# Altium PCB GPS SIM868-V10-ST-F0.PcbDoc (part 2 of 2)
Units mm, origin at the board's own origin, x right, y up, seen from the top; angles counter-clockwise.
Board outline 43.41 x 89 mm, 2 copper layers (Top Layer, Bottom Layer); 89 components, 73 nets, 330 pads, 120 vias.
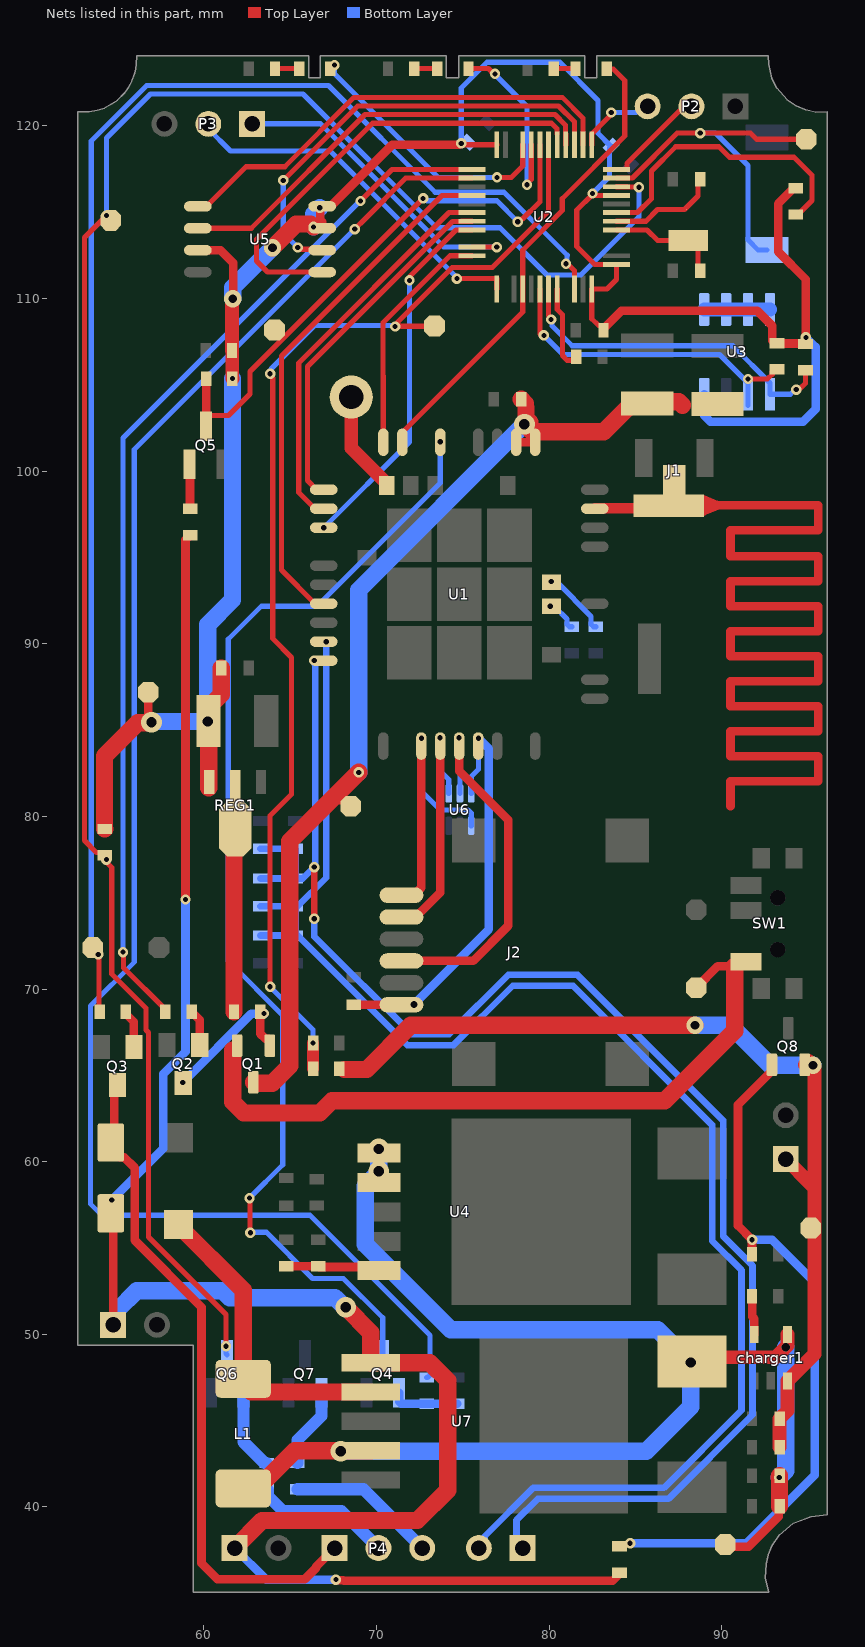
[diagram p2: the nets of this part, all layers, seen from the top]

## Via types
v1: diameter 0.6, hole 0.3, Top Layer to Bottom Layer, tented both sides, 95 vias
v2: diameter 1.2, hole 0.6, Top Layer to Bottom Layer, tented both sides, 12 vias
v3: diameter 1, hole 0.5, Top Layer to Bottom Layer, tented both sides, 10 vias
v4: diameter 0.5, hole 0.5, Top Layer to Bottom Layer, tented both sides, 1 vias
v5: diameter 0.8, hole 0.4, Top Layer to Bottom Layer, tented both sides, 1 vias
v6: diameter 1, hole 0.6, Top Layer to Bottom Layer, tented both sides, 1 vias

## Nets (pads, with @x,y where several pads share a name; then routed paths per layer and width w, separated by ;. In a path a pad name is that pad's centre, name@x,y a point inside that pad or via, vN(x,y) a via of type N, cw(c..) or ccw(c..) an arc to the next point about the centre after c; other vN are vias at no path point) (continued)
IOMC: pad.13@54.603,114.525 Q6.3 R16.2 U2.10 | length 115.4
  Top Layer w0.3: v1@54.275,77.424 v1(54.346,77.495) ; v1(54.346,114.808) 53.074,113.537 53.074,78.599 53.774,77.899 54.104,77.899 R16.2@54.254,77.749 54.254,77.546 54.204,77.495 54.661,77.038 54.661,70.866 56.642,68.885 56.642,67.626 56.791,67.477 56.791,55.629 61.272,51.148 v1(61.272,49.301) ; U2.10@83.89,116.476 84.51,116.476 84.52,116.466 85.177,116.466 v1(85.195,116.448)
  Bottom Layer w0.3: v1(54.346,114.808) 54.346,119.293 56.896,121.844 65.731,121.844 73.478,114.097 77.14,114.097 79.874,111.363 81.822,111.363 85.19,114.73 85.19,116.443 v1(85.195,116.448) ; v1(61.272,49.301) 61.272,48.877 Q6.3@61.341,48.809
MEM_CLK: U2.15 U5.6 | length 26.1
  Top Layer w0.3: v1(64.59,116.842) 68.901,121.154 80.541,121.154 81.46,120.235 U2.15@81.46,118.906 ; v1(65.428,112.957) 65.509,112.957 65.607,112.859 66.804,112.859 U5.6@66.828,112.834
  Bottom Layer w0.3: v1(64.59,116.842) 64.59,113.794 v1(65.428,112.957)
MEM_CS: U2.14 U5.1 | length 27
  Top Layer w0.3: U5.1@59.646,115.341 60.146,115.341 62.44,117.635 64.676,117.635 68.694,121.654 80.749,121.654 81.96,120.442 U2.14@81.96,118.906
MEM_SI: U2.17 U5.5 | length 26
  Top Layer w0.3: U5.5@66.846,111.531 63.682,111.531 63.043,112.17 63.043,113.436 69.76,120.154 80.127,120.154 80.45,119.831 U2.17@80.45,119.536
MEM_SO: U2.16 U5.2 | length 25.4
  Top Layer w0.3: U5.2@59.646,114.071 62.738,114.071 69.321,120.654 80.334,120.654 80.95,120.038 80.95,119.536 80.96,119.526 U2.16@80.96,118.906
MIC_N: C9.2 C10.2 C11.1 C12.1 P1.1 U1.10 | length 89.9
  Top Layer w0.381: v1(66.386,77.064) 66.386,74.204 66.455,74.135 v1@66.455,74.075
  Bottom Layer w0.381: C9.2@63.271,76.403 C10.2@65.303,76.403 ; C12.1@63.271,78.13 C11.1@65.303,78.13 C10.2@65.303,76.403 ; v1(66.382,89.027) 66.424,88.985 66.424,88.83 66.442,88.813 66.442,77.274 66.428,77.26 66.428,77.106 v1(66.386,77.064) 65.726,76.403 C10.2@65.303,76.403 ; v1(66.386,74.075) 66.386,73.041 72.041,67.386 74.193,67.386 77.627,70.82 81.64,70.82 90.068,62.391 90.068,55.686 91.774,53.98 91.774,45.334 86.902,40.462 79.329,40.462 78.105,39.238 78.105,37.973 P1.1@78.461,37.617
MIC_P: C7.2 C8.2 C9.1 C10.1 P1.2 U1.9 | length 89.4
  Top Layer w0.381: U1.9@66.937,90.124 67.026,90.124 U1.9@67.081,90.068
  Bottom Layer w0.381: C7.2@63.271,73.101 C8.2@65.303,73.101 ; C9.1@63.271,74.803 C10.1@65.303,74.803 ; v1@67.081,90.068 67.077,90.064 67.077,76.451 65.428,74.803 C10.1@65.303,74.803 ; P1.2@75.921,37.617 75.921,37.844 76.269,38.192 76.269,38.3 79.066,41.097 86.639,41.097 91.139,45.597 91.139,53.717 89.433,55.423 89.433,62.128 81.377,70.185 77.89,70.185 74.456,66.751 71.778,66.751 65.428,73.101 65.413,73.101 65.303,73.211 C10.1@65.303,74.803
  other v1: 67.081,90.119
"motion sensor": pad.13@94.894,119.228 SENSOR1.1 U2.11 | length 21.4
  Top Layer w0.3: U2.11@83.89,116.976 84.803,116.976 84.813,116.986 84.815,116.986 87.413,119.583 91.645,119.583 92,119.228 pad.13@94.894,119.228
  Bottom Layer w0.3: v1(88.748,119.583) 89.637,119.583 91.508,117.711 91.508,113.401 92.108,112.801 SENSOR1.1@92.608,112.801
NetA1_1: A1.1 J1.3 U1.32 | length 5.8
  Top Layer w0.3: A1.1@86.919,97.993 87.249,98.323 J1.3@87.249,99.352
  Top Layer w0.5: U1.32@82.637,97.824 U1.32@82.656,97.843
  Top Layer w0.6: U1.32@82.656,97.843 A1.1@86.919,97.843
NetAnt1_1: Ant1.1 U1.68 | length 6
  Top Layer w0.8: Ant1.1@68.529,104.292 68.529,101.331 70.587,99.274 U1.68@70.587,99.174
Netcharger1_5: charger1.5 R23.1 | length 2.3
  Top Layer w0.5: R23.1@91.745,52.197 91.745,52.027 91.75,52.022 91.75,51.022 91.872,50.9 charger1.5@91.872,49.987
NetD1_A: D1.A P4.1 Q3.3 | length 39.1
  Top Layer w0.5: Q3.3@54.991,64.432 54.798,64.239 54.798,61.302 D1.A@54.606,61.109 54.606,60.769 55.121,60.254 55.371,60.254 55.982,59.643 55.982,55.448 59.858,51.572 59.858,36.742 60.786,35.814 65.837,35.814 66.499,36.476 66.499,36.552 P4.1@67.564,37.617
NetD2_2: D2.2 L1.1 U7.2 | length 18.6
  Top Layer w1: D2.2@58.318,56.363 58.468,56.363 62.272,52.559 62.272,47.117 62.731,46.658 U7.2@69.664,46.658
NetLED1_2: LED1.2 R1.1 | length 1.3
  Top Layer w0.3: R1.1@80.264,123.317 LED1.2@81.521,123.317
NetLED2_1: LED2.1 U2.20 | length 11.3
  Top Layer w0.3: LED2.1@75.324,123.317 76.474,123.317 76.779,123.012 v1(76.86,123.012) ; v1(78.715,116.586) 78.715,116.667 78.96,116.913 U2.20@78.96,118.906
  Bottom Layer w0.3: v1(76.86,123.012) 76.86,122.982 78.715,121.127 v1(78.715,116.586)
NetLED2_2: LED2.2 R6.2 | length 1.3
  Top Layer w0.3: R6.2@72.187,123.317 LED2.2@73.52,123.317
NetLED3_1: LED3.1 U2.21 | length 15.4
  Top Layer w0.3: v1(76.972,117.018) 77.8,117.018 78.46,117.678 U2.21@78.46,118.906
  Bottom Layer w0.3: v1(67.564,123.52) 67.564,123.026 73.572,117.018 v1(76.972,117.018)
NetLED3_2: LED3.2 R7.2 | length 1.4
  Top Layer w0.3: R7.2@64.11,123.317 LED3.2@65.519,123.317
NETLIGHT: LED1.1 U1.41 U2.40 | length 27.6
  Top Layer w0.3: U1.41@71.487,101.674 71.487,102.246 78.46,109.22 78.46,111.176 78.461,112.801 80.753,115.094 80.753,115.784 84.379,119.409 84.379,122.631 83.706,123.304 83.337,123.304 LED1.1@83.325,123.317
NetP4_2: P4.2 R20.2 | length 8.1
  Bottom Layer w0.7: R20.2@63.627,41.021 63.677,40.971 63.702,40.971 63.702,40.641 64.592,39.751 67.97,39.751 P4.2@70.104,37.617
NetP4_3: P4.3 R21.2 | length 8.6
  Bottom Layer w0.7: R21.2@65.405,41.021 69.24,41.021 P4.3@72.644,37.617
NetQ1_1: Q1.1 Q2.3 R2.1 | length 9
  Top Layer w0.5: v1(58.768,64.592) Q2.3@58.801,64.559 ; v1(63.475,68.58) 63.373,68.682 R2.1@63.263,68.682 63.263,67.412 63.556,67.119 63.76,67.119 63.815,67.064 Q1.1@63.815,66.719
  Bottom Layer w0.5: v1(58.768,64.592) 62.736,68.561 63.455,68.561 v1(63.475,68.58)
NetQ2_1: Q2.1 R5.1 | length 2.2
  Top Layer w0.5: R5.1@59.286,68.682 59.286,68.557 59.336,68.507 59.453,68.507 59.751,68.209 Q2.1@59.751,66.759
NetQ3_1: Q3.1 R11.1 | length 2.2
  Top Layer w0.5: R11.1@55.476,68.682 55.476,68.557 55.941,68.092 Q3.1@55.941,66.632
NetQ4_1: Q4.1 R12.1 R14.1 | length 3.9
  Bottom Layer w0.5: Q4.1@71.308,46.609 71.308,46.109 71.443,45.974 R12.1@72.898,45.974 R14.1@74.676,45.974
NetQ5_1: Q5.1 R19.1 | length 2.6
  Top Layer w0.5: Q5.1@59.172,100.398 59.19,100.381 59.19,97.833 R19.1@59.207,97.815
NetQ6_1: Q6.1 R20.1 | length 4.7
  Bottom Layer w0.7: Q6.1@62.291,46.609 62.291,43.756 63.502,42.545 R20.1@63.627,42.545
NetQ7_1: Q7.1 R21.1 | length 4.6
  Bottom Layer w0.7: R21.1@65.405,42.545 65.405,43.866 66.797,45.258 Q7.1@66.797,46.609
NetQ8_1: Q8.1 R24.2 R26.1 | length 40.3
  Top Layer w0.5: R26.1@91.745,54.635 91.747,54.638 91.747,55.476 v1(91.75,55.479) 90.932,56.297 90.932,63.299 92.903,65.27 Q8.1@92.903,65.615
  Bottom Layer w0.5: v1(84.684,37.897) 91.44,37.897 95.372,41.829 95.372,53.015 92.908,55.479 v1(91.75,55.479)
NetR3_1: R3.1 U2.44 | length 5
  Top Layer w0.3: U2.44@80.46,110.546 80.46,109.357 80.76,109.057 80.76,106.702 81.036,106.426 81.409,106.426 81.559,106.576 R3.1@81.559,106.629
NetR4_2: R4.2 U2.7 | length 16.7
  Top Layer w0.3: U2.7@84.52,114.976 85.12,114.976 85.928,115.784 85.928,117.392 87.332,118.796 89.84,118.796 90.449,118.186 94.183,118.186 95.225,117.145 95.225,115.681 94.409,114.865 R4.2@94.284,114.865
NetR10_1: R10.1 R18.2 U4.5 | length 5.5
  Top Layer w0.5: R18.2@64.77,53.95 R10.1@66.624,53.95 66.674,53.9 69.921,53.9 U4.5@70.134,53.686
NetR27_2: R27.2 U1.62 | length 4
  Top Layer w0.3: v1(80.112,93.599) U1.62@80.137,93.574
  Bottom Layer w0.3: v1(80.112,93.599) 80.169,93.542 80.474,93.542 82.427,91.588 82.427,91.133 82.577,90.983 R27.2@82.702,90.983
NetR28_2: R28.2 U1.61 | length 2
  Top Layer w0.3: v1(80.061,92.177) 80.134,92.177 U1.61@80.137,92.174
  Bottom Layer w0.3: v1(80.061,92.177) 80.118,92.119 80.347,92.119 81.03,91.436 81.03,91.133 81.18,90.983 R28.2@81.305,90.983
NetU3_1: U3.1 U3.2 U3.3 U3.4 | length 3.8
  Bottom Layer w0.8: U3.1@88.976,109.364 U3.2@90.246,109.364 U3.3@91.516,109.364 U3.4@92.786,109.364
ONOFF_SIM: Q4.3 U1.39 | length 66.8
  Top Layer w0.3: v1(62.636,57.887) 62.662,57.861 62.662,55.905 v1(62.687,55.88)
  Top Layer w0.5: v1(73.685,101.702) 73.685,101.675 U1.39@73.687,101.674
  Bottom Layer w0.3: v1(62.636,57.887) 64.567,59.817 64.567,68.474 61.404,71.637 61.404,90.258 63.322,92.177 66.548,92.177 73.685,99.314 v1(73.685,101.702) ; v1(62.687,55.88) 62.713,55.905 63.627,55.905 66.294,53.238 68.072,53.238 70.358,50.952 Q4.3@70.358,48.809
ONOFF_STM: R12.2 U2.26 | length 96.2
  Top Layer w0.3: v1(68.732,114.021) 69.318,114.606 71.688,116.976 U2.26@75.53,116.976
  Bottom Layer w0.3: v1(68.732,114.021) 55.961,101.249 55.961,71.556 53.416,69.012 53.416,57.556 54.077,56.896 66.142,56.896 73.101,49.936 73.101,47.648 72.951,47.498 R12.2@72.898,47.498
OSC_IN: C24.1 U2.5 X1.2 | length 6.5
  Top Layer w0.3: U2.5@83.89,113.976 85.668,113.976 86.283,113.361 87.927,113.361 88.176,113.361 88.626,112.911 C24.1@88.626,111.608
OSC_OUT: C25.1 U2.6 X1.1 | length 6.3
  Top Layer w0.3: U2.6@83.89,114.476 85.596,114.476 86.279,115.158 87.838,115.158 88.626,115.946 C25.1@88.626,116.916
PWCUT: R5.2 U2.25 | length 60.9
  Top Layer w0.3: v1(55.311,72.136) 55.333,72.114 55.333,71.236 57.762,68.807 R5.2@57.762,68.682 ; v1(69.063,115.646) 70.892,117.476 U2.25@75.53,117.476
  Bottom Layer w0.3: v1(55.311,72.136) 55.311,101.912 69.045,115.646 v1(69.063,115.646)
RelayMC: pad.13@53.557,72.402 R11.2 U2.46 | length 86.4
  Top Layer w0.3: pad.13@53.557,72.402 53.873,72.086 v1(53.873,72.009) ; R11.2@53.952,68.682 53.913,68.721 53.913,71.967 pad.13@53.952,72.007 ; v1(80.974,112.013) 81.055,112.013 81.46,111.607 U2.46@81.46,110.546
  Bottom Layer w0.3: v1(53.873,72.009) 53.467,72.415 53.467,119.122 56.689,122.344 67.216,122.344 73.399,116.161 77.387,116.161 81.045,112.503 81.031,112.49 81.031,112.07 v1(80.974,112.013)
RESET: U1.3 U2.32 | length 21.3
  Top Layer w0.3: v1(71.904,111.052) 71.961,111.11 71.961,111.322 74.605,113.966 75.52,113.966 U2.32@75.53,113.976
  Bottom Layer w0.3: v1(66.937,96.724) 71.904,101.691 v1(71.904,111.052)
RING: U1.7 U2.28 | length 30.6
  Top Layer w0.3: U1.7@66.937,92.324 66.437,92.324 64.489,94.271 64.489,106.678 73.787,115.976 U2.28@75.53,115.976
RX: P2.3 U2.13 | length 4.6
  Top Layer w0.3: U2.13@82.46,118.906 82.46,119.526 83.539,120.604 83.539,120.72 v1(83.596,120.777)
  Bottom Layer w0.3: v1(83.596,120.777) 85.019,120.777 85.375,121.133 P2.3@85.7,121.133
SCL: R9.2 U2.42 U3.6 | length 19.3
  Top Layer w0.3: U2.42@79.46,110.546 79.46,107.953 79.491,107.922 79.632,107.922 v1(79.69,107.864) ; v1(91.516,105.334) 92.634,105.334 92.918,105.618 92.918,105.743 93.068,105.893 R9.2@93.193,105.893
  Bottom Layer w0.3: v1(79.69,107.864) 80.79,106.764 89.856,106.764 91.401,105.219 U3.6@91.516,105.104 ; U3.6@91.516,103.804 U3.6@91.516,105.104 ; v1(91.516,105.334) U3.6@91.516,105.104
SDA: R8.2 U2.43 U3.5 | length 19.9
  Top Layer w0.3: U2.43@79.96,110.546 79.96,109.019 80.11,108.869 v1(80.11,108.788) ; v1(94.31,104.724) 94.368,104.782 94.533,104.782 94.844,105.092 R8.2@94.844,105.842
  Bottom Layer w0.3: v1(80.11,108.788) 80.168,108.731 80.168,108.427 81.331,107.264 90.626,107.264 92.786,105.104 U3.5@92.786,104.454 93.958,104.454 94.229,104.724 v1(94.31,104.724)
"SIM_ I/O": J2.6 U1.15 U6.1 | length 17.2
  Top Layer w0.3: U1.15@72.587,84.074 72.587,84.525 v1(72.593,84.531)
  Top Layer w0.5: J2.6@71.438,75.438 72.158,75.438 72.587,75.867 U1.15@72.587,84.074
  Bottom Layer w0.3: v1(72.593,84.531) 72.593,81.458 73.685,80.366 75.303,80.366 75.478,80.19 U6.1@75.478,79.456
SIM_CLK: J2.3 U1.16 U6.4 | length 15.3
  Top Layer w0.3: v1(73.674,84.56) 73.687,84.547 U1.16@73.687,84.074
  Top Layer w0.5: J2.3@71.438,74.168 72.263,74.168 73.687,75.592 U1.16@73.687,84.074
  Bottom Layer w0.3: v1(73.674,84.56) 73.674,82.638 74.178,82.133 U6.4@74.178,81.326
SIM_RST: J2.2 U1.17 U6.5 | length 22.4
  Top Layer w0.3: v1(74.778,84.557) 74.787,84.547 U1.17@74.787,84.074
  Top Layer w0.5: J2.2@71.438,71.628 75.59,71.628 77.622,73.66 77.622,79.795 74.787,82.631 U1.17@74.787,84.074
  Bottom Layer w0.3: v1(74.778,84.557) 74.828,84.506 U6.5@74.828,81.326
SIM_VDD: C15.2 J2.1 U1.18 U6.6 | length 24.8
  Top Layer w0.3: U1.18@75.887,84.074 75.887,84.523 v1(75.895,84.531)
  Top Layer w0.5: C15.2@68.682,69.088 J2.1@71.438,69.088 72.136,69.088 v5(72.161,69.113)
  Bottom Layer w0.3: U6.6@75.478,81.326 75.478,82.311 75.895,82.728 v1@75.895,84.504
  Bottom Layer w0.5: v5(72.161,69.113) 76.505,73.457 76.505,83.922 v1(75.895,84.531)
SRXD: U1.2 U2.30 | length 23
  Top Layer w0.3: U1.2@66.937,97.824 66.437,97.824 65.489,98.771 65.489,106.264 74.201,114.976 U2.30@75.53,114.976
STATUS: U1.42 U2.35 | length 13.7
  Top Layer w0.3: U1.42@70.387,101.674 70.387,105.5 70.368,105.519 70.368,108.597 74.247,112.476 U2.35@75.53,112.476
STXD: U1.1 U2.31 | length 20.8
  Top Layer w0.3: U1.1@66.937,98.924 66.518,98.924 65.989,99.452 65.989,106.057 74.398,114.466 74.9,114.466 74.91,114.476 U2.31@75.53,114.476
SWCK: P3.2 U2.37 | length 21.2
  Top Layer w0.3: v1(74.651,111.15) 76.95,111.15 76.96,111.14 U2.37@76.96,110.546
  Bottom Layer w0.3: P3.2@60.249,120.117 60.249,119.837 61.544,118.542 67.31,118.542 74.651,111.201 v1(74.651,111.15)
SWIO: P3.1 U2.34 | length 18.6
  Top Layer w0.3: U2.34@75.53,112.976 75.532,112.978 76.96,112.978 v1(76.962,112.979)
  Bottom Layer w0.3: P3.1@62.789,120.117 P3.1@62.903,120.117 ; P3.1@62.903,120.231 63.009,120.125 66.743,120.125 73.889,112.979 v1(76.962,112.979)
TP1: C17.1 C18.1 C23.1 charger1.4 L1.2 pad.13@90.195,37.821 U4.1 U4.2 U7.4 | length 80.5
  Top Layer w0.5: pad.13@90.195,37.821 90.545,37.624 90.545,37.635 90.625,37.691 91.539,37.691 93.294,39.446 93.294,39.98 C18.1@93.344,40.03
  Top Layer w0.8: v2(88.197,48.362) 88.502,48.666 93.116,48.666 93.802,49.352 charger1.4@93.802,49.987
  Top Layer w1: L1.2@62.272,40.767 62.773,40.767 65.264,43.258 67.892,43.258 v2(67.92,43.231) 67.947,43.258 U7.4@69.664,43.258 ; v1(93.32,41.707) 93.344,41.732 C23.1@93.344,41.808 ; C18.1@93.344,40.03 C23.1@93.344,41.707
  Bottom Layer w1: v2(67.92,43.231) 85.623,43.231 88.197,45.805 v2(88.197,48.362) 86.292,50.267 74.295,50.267 69.342,55.22 69.342,58.594 70.129,59.382 v2(70.129,59.436) v2(70.129,60.731) ; v1(93.32,41.707) 93.701,42.088 v4(93.701,49.251)
TP2: C21.1 C22.1 charger1.3 P5.1 pad.13@95.145,56.152 Q8.2 R22.2 | length 55.2
  Top Layer w0.8: C22.1@93.344,43.459 C21.1@93.344,45.11 93.802,45.568 charger1.3@93.802,47.295 95.372,48.864 95.372,55.918 95.238,56.052 95.238,56.145 pad.13@95.245,56.152 ; P5.1@93.701,60.147 95.169,58.679 95.372,58.679 ; Q8.2@94.803,65.615 95.023,65.835 v3(95.275,65.583) 95.372,65.486 95.372,58.679 ; pad.13@95.372,56.152 95.372,58.679
  Top Layer w1: R22.2@68.135,65.341 69.431,65.341 71.984,67.894 v3(88.443,67.894)
  Bottom Layer w1: v3(88.443,67.894) 90.483,67.894 92.795,65.583 v3(95.275,65.583)
TP4: C4.1 C5.1 C6.1 C19.1 C20.2 pad.13@56.769,87.198 R4.1 R8.1 R9.1 R15.1 R16.1 R17.1 REG1.3 U2.1 U2.9 U2.24 U2.48 U3.8 U5.3 U5.7 U5.8 | length 137.5
  Top Layer w0.3: v3(61.671,109.982) v3@61.697,110.007 ; v1@74.922,118.906 U2.24@76.96,118.906 ; v1@82.448,115.976 U2.9@83.89,115.976 ; v1(82.503,116.082) 82.503,116.031 81.595,115.123 81.595,113.018 82.637,111.976 U2.1@83.89,111.976 83.89,111.094 83.342,110.546 U2.48@82.46,110.546 82.46,108.833 82.865,108.428 82.99,108.428 83.14,108.278 C5.1@83.14,108.153 ; R9.1@92.918,107.567 93.068,107.417 R9.1@93.193,107.417 R9.1@93.218,107.391
  Top Layer w0.5: pad.13@56.769,87.198 56.769,85.841 56.962,85.648 v2(56.962,85.458) ; U5.3@59.646,112.801 60.96,112.801 61.697,112.065 v3@61.697,110.007 ; U5.7@66.421,114.071 U5.7@66.846,114.071 66.846,114.432 66.737,114.54 U5.8@66.737,115.233 ; U5.8@66.846,115.341 67.346,115.341 70.91,118.906 74.795,118.906 74.878,118.989 v1(74.905,118.989) ; C5.1@83.19,108.316 83.19,108.328 83.211,108.328 84.179,109.296 92.05,109.296 92.918,108.428 R9.1@92.918,107.567 ; R9.1@93.218,107.391 R8.1@94.818,107.391 ; R4.1@94.284,116.389 94.261,116.411 94.181,116.411 93.269,115.499 93.269,112.702 94.869,111.102 v1(94.869,107.747)
  Top Layer w0.8: v1(61.646,105.359) 61.633,105.372 61.633,106.972 R17.1@61.62,106.985 61.62,109.904 61.671,109.955 v3(61.671,109.982)
  Top Layer w1: R16.1@54.254,79.273 54.232,79.296 54.232,83.493 56.159,85.42 56.924,85.42 v2(56.962,85.458) ; C19.1@60.256,86.328 60.992,87.065 C20.2@60.992,88.592 ; REG1.3@60.281,81.661 C19.1@60.281,85.494 ; v3(63.97,112.941) 65.346,114.318 66.175,114.318 v1(66.345,114.148)
  Bottom Layer w0.3: C4.1@74.905,119.133 74.905,122.199 76.388,123.682 80.618,123.682 82.829,121.471 82.829,119.568 C6.1@83.586,118.812 83.498,118.723 83.498,117.076 v1(82.503,116.082)
  Bottom Layer w0.5: U3.8@88.976,104.454 88.996,104.434 88.996,103.206 89.332,102.87 94.717,102.87 95.428,103.581 95.428,107.188 v1(94.869,107.747)
  Bottom Layer w1: v2(56.962,85.458) 57,85.496 v2(60.223,85.496) 60.223,91.11 61.646,92.532 v1(61.646,105.359) ; v3(61.671,109.982) 61.671,110.642 v3(63.97,112.941) ; v1(66.345,114.148) 66.345,114.893 v1(66.707,115.255)
TP5: pad.13@88.519,70.079 Q1.2 R2.2 REG1.2 SW1.1 | length 51.4
  Top Layer w0.5: pad.13@88.519,70.079 89.768,71.327 SW1.1@90.739,71.327
  Top Layer w1: Q1.2@61.665,66.469 61.665,63.455 62.306,62.814 66.707,62.814 67.418,63.525 86.69,63.525 90.739,67.575 SW1.1@90.739,71.327 ; R2.2@61.739,68.682 REG1.2@61.739,79.218
TP6: pad.13@73.355,108.407 R22.1 R25.2 U2.18 | length 68.7
  Top Layer w0.3: v1(63.83,70.129) 63.83,80.035 65.075,81.28 65.075,89.205 63.983,90.297 63.983,105.405 63.83,105.557 v1(63.83,105.639) ; pad.13@73.355,108.407 73.343,108.395 71.085,108.395 v1(71.073,108.383) 71.073,108.464 71.223,108.614 71.223,108.642 74.381,111.8 76.702,111.8 79.96,115.058 U2.18@79.96,118.906
  Top Layer w0.7: R22.1@66.319,65.38 v1(66.319,66.878)
  Bottom Layer w0.3: v1(63.83,70.129) 66.319,67.64 v1(66.319,66.878) ; v1(63.83,105.639) 63.888,105.696 63.888,105.909 66.416,108.437 71.018,108.437 v1(71.073,108.383)
TP7: pad.13@64.084,108.179 Q5.3 R15.2 U2.19 | length 32.5
  Top Layer w0.3: Q5.3@60.122,103.025 60.322,103.225 61.417,103.225 62.662,104.47 62.662,105.77 v1(72.693,115.801) ; v1(78.179,114.45) 78.26,114.45 78.41,114.6 78.456,114.6 79.46,115.605 U2.19@79.46,118.906
  Top Layer w0.5: Q5.3@60.122,102.598 60.122,103.098 R15.2@60.122,105.359
  Bottom Layer w0.3: v1(72.693,115.801) 72.774,115.801 72.914,115.661 76.968,115.661 v1(78.179,114.45)
TP12: C1.1 C2.1 C3.1 pad.13@68.504,80.594 Q1.3 U1.34 U1.35 | length 60.4
  Top Layer w0.3: 67.437,81.026 67.631,80.832 68.266,80.832 pad.13@68.504,80.594
  Top Layer w0.5: v2@78.616,102.718 v2(78.562,102.718) 78.562,102.676 78.087,102.201 U1.35@78.087,101.674 U1.34@79.187,101.674
  Top Layer w1: Q1.3@62.865,64.599 62.923,64.541 63.957,64.541 64.964,65.548 64.964,78.553 67.437,81.026 v1(68.961,82.55) ; C1.1@78.384,104.165 C1.1@78.627,103.922 ; v2@78.651,102.692 78.651,103.685 ; v2@78.877,102.837 78.877,102.409 79.002,102.284 83.158,102.284 84.596,103.722 84.723,103.722 85.021,104.02 87.509,104.02 87.719,103.81
  Bottom Layer w1: v1(68.961,82.55) 68.961,93.116 v2(78.562,102.718)
TX: P2.2 U2.12 | length 6.1
  Top Layer w0.3: U2.12@83.89,117.476 84.496,117.476 84.506,117.486 84.506,117.831 87.578,120.903 88.01,120.903 P2.2@88.24,121.133
V12: C16.P D1.C P6.1 R19.2 R24.1 U7.1 | length 114.7
  Top Layer w0.5: D1.C@54.475,57.218 54.475,57.599 v1(54.661,57.785) ; D1.C@54.606,57.009 54.737,56.878 C16.P@54.737,50.546 ; v1(58.928,75.184) 58.928,96.012 R19.2@59.207,96.291 ; v1(67.64,35.789) 67.678,35.75 68.061,35.75 68.098,35.712 83.666,35.712 84.074,36.12 R24.1@84.074,36.195
  Top Layer w1: P6.1@61.773,37.617 63.372,39.217 72.364,39.217 74.117,40.97 74.117,47.32 73.079,48.358 U7.1@69.664,48.358 69.664,50.097 68.204,51.557 v2(68.204,51.567)
  Bottom Layer w0.5: v1(54.661,57.785) 57.633,60.757 57.633,65.075 58.928,66.37 v1(58.928,75.184) ; P6.1@61.773,37.617 63.602,35.789 v1(67.64,35.789)
  Bottom Layer w1: C16.P@54.737,50.546 54.987,50.796 54.987,51.406 56.109,52.527 61.087,52.527 61.493,52.121 67.596,52.121 68.15,51.567 v2(68.204,51.567)
pads on no net: charger1.1 J2. J2.5 L1.0 SW1. SW1.3 U6.3

## Polygon pours and split planes (outlines as drawn)
GND on Top Layer "GND_L01_P000" (solid, pour order 0): 57.81,123.825 91.11,123.825 96.012,118.923 96.012,103.276 79.299,103.276 79.273,103.302 79.146,103.175 79.146,77.064 96.012,77.064 96.012,63.729 52.699,63.729 52.699,118.714
GND on Bottom Layer "GND_L02_P001" (solid, pour order 1): 57.809,123.698 91.108,123.698 96.011,118.796 96.011,103.15 79.297,103.15 79.272,103.175 79.145,103.048 79.145,76.937 96.011,76.937 96.011,63.602 52.698,63.602 52.698,118.587

## Keep-outs
Keep-Out Layer:
  lines w0.05: 52.691,49.352 54.361,49.352 57.703,49.352 59.374,49.352 ; 52.698,49.352 52.699,120.808 53.353,120.813 53.812,120.897 54.23,121.034 54.814,121.36 54.981,121.493 55.385,121.886 55.59,122.158 55.77,122.477 55.999,123.067 56.048,123.305 56.089,123.572 56.098,124.059 66.063,124.059 66.065,122.784 ; 59.383,49.352 59.383,35.171 59.383,35.06 92.702,35.06 92.522,35.892 92.569,36.692 92.675,37.23 92.899,37.724 93.329,38.373 94.129,39.04 95.173,39.435 96.097,39.546 96.1,120.806 95.416,120.805 94.851,120.933 94.284,121.175 93.778,121.52 93.187,122.194 92.892,122.753 92.712,123.577 92.692,124.052 82.748,124.059 82.748,122.784 ; 66.065,122.784 66.747,122.784 66.748,124.059 74.047,124.058 74.047,122.784 ; 74.047,122.784 74.748,122.783 74.746,124.057 82.047,124.06 82.047,122.784 ; 82.047,122.784 82.748,122.784

## Other copper
Top Layer:
  rectangle net GND: 86.081,79.629 89.611,80.823
  rectangle net GND: 70.536,87.909 78.994,97.866
  rectangle net GND: 86.081,78.537 95.86,79.731
  rectangle net GND: 84.176,100.787 95.809,102.311
  rectangle net GND: 81.661,96.215 83.541,97.028
  rectangle net GND: 81.661,92.024 84.938,96.469
  rectangle net TP5: 61.163,66.04 62.255,69.367
  rectangle net GND: 75.362,100.711 77.368,104.673
  rectangle net TP12: 77.8,100.711 79.502,104.673
  rectangle net TP2: 67.183,64.846 69.088,65.837
  rectangle net TP1: 68.402,58.141 72.949,61.366
  rectangle net TP12: 83.972,102.895 91.465,104.724
  rectangle net GND: 84.049,106.375 91.491,108.229
  rectangle net TP4: 65.989,113.69 67.716,115.773
Bottom Layer:
  rectangle net GND: 86.462,110.642 90.297,118.034

## Silkscreen, mask and mechanical layers (free items; w line width, h text height)
Top Overlay:
  text "TP11" at 93.447,117.653 h1
  text "TP9" at 53.813,115.402 h1
  text "TP7" at 63.348,109.068 h1
  text "TP6" at 72.695,106.778 h1
  text "TP4" at 55.983,88.184 h1
  text "TP12" at 67.589,78.969 h1
  text "TP3" at 87.565,75.576 h1
  text "TP8" at 52.81,73.541 h1
  text "TP10" at 56.49,73.541 h1
  text "TP5" at 87.565,71.181 h1
  text "TP2" at 94.266,57.099 h1
  text "TP1" at 89.535,36.017 h1
Mechanical 1:
  lines w0.013: 52.698,43.228 52.698,44.228 ; 52.698,52.078 57.448,52.078 57.448,53.078 52.698,53.078 ; 52.698,75.728 57.448,75.728 57.448,76.728 52.698,76.728 ; 52.698,78.958 54.348,78.958 54.348,79.958 52.698,79.958 ; 52.698,102.258 54.348,102.258 54.348,103.258 52.698,103.258 ; 52.698,110.178 57.448,110.178 57.448,111.178 52.698,111.178 ; 52.698,118.258 54.348,118.258 54.348,119.258 52.698,119.258 ; 57.098,124.058 57.098,123.558 56.098,123.558 56.098,124.058 ; 91.698,124.058 91.698,123.558 92.698,123.558 92.698,124.058 ; 96.098,41.558 94.348,41.558 94.348,42.558 96.098,42.558 ; 96.098,56.928 91.248,56.928 91.248,57.928 96.098,57.928 ; 96.098,62.758 66.348,62.758 66.348,82.708 96.098,82.708 ; 96.098,80.578 91.248,80.578 91.248,81.578 96.098,81.578 ; 96.098,102.258 94.348,102.258 94.348,103.258 96.098,103.258 ; 96.098,111.028 91.248,111.028 91.248,112.028 96.098,112.028 ; 96.098,118.258 94.348,118.258 94.348,119.258 96.098,119.258 ; 56.098,124.058 56.102,123.72 56.068,123.387 55.999,123.061 55.895,122.745 55.758,122.442 55.588,122.156 55.387,121.887 55.156,121.641 54.899,121.421 54.622,121.232 54.328,121.076 54.019,120.952 53.699,120.863 53.371,120.808 53.036,120.79 52.698,120.808 52.698,39.508 53.119,39.515 53.532,39.47 53.933,39.374 54.318,39.229 54.63,39.065 55.063,38.765 55.33,38.525 55.605,38.207 55.837,37.857 56.022,37.485 56.158,37.095 56.244,36.693 56.28,36.284 56.264,35.872 56.198,35.462 56.078,35.058 92.718,35.058 92.599,35.462 92.532,35.872 92.517,36.284 92.553,36.693 92.639,37.095 92.775,37.485 92.959,37.857 93.192,38.207 93.467,38.525 93.776,38.803 94.115,39.038 94.479,39.229 94.864,39.374 95.265,39.47 95.678,39.515 96.098,39.508 96.098,120.808 95.76,120.79 95.426,120.808 95.097,120.863 94.777,120.952 94.469,121.076 94.174,121.232 93.897,121.421 93.641,121.641 93.409,121.887 93.208,122.156 93.039,122.442 92.901,122.745 92.798,123.061 92.728,123.387 92.695,123.72 92.698,124.058 ; 56.098,124.058 66.048,124.058 66.048,122.258 66.748,122.258 66.748,124.058 74.048,124.058 74.048,122.258 74.748,122.258 74.748,124.058 82.048,124.058 82.048,122.258 82.748,122.258 82.748,124.058 92.698,124.058